# Altium PCB m_tas3_4layer.PcbDoc (part 2 of 2)
Units mm, origin at the board's own origin, x right, y up, seen from the top; angles counter-clockwise.
Board outline 100.71 x 81.15 mm, 4 copper layers (Top Layer, PWR, GND, Bottom Layer), stack 0.603 mm thick; 79 components, 40 nets, 216 pads, 95 vias.
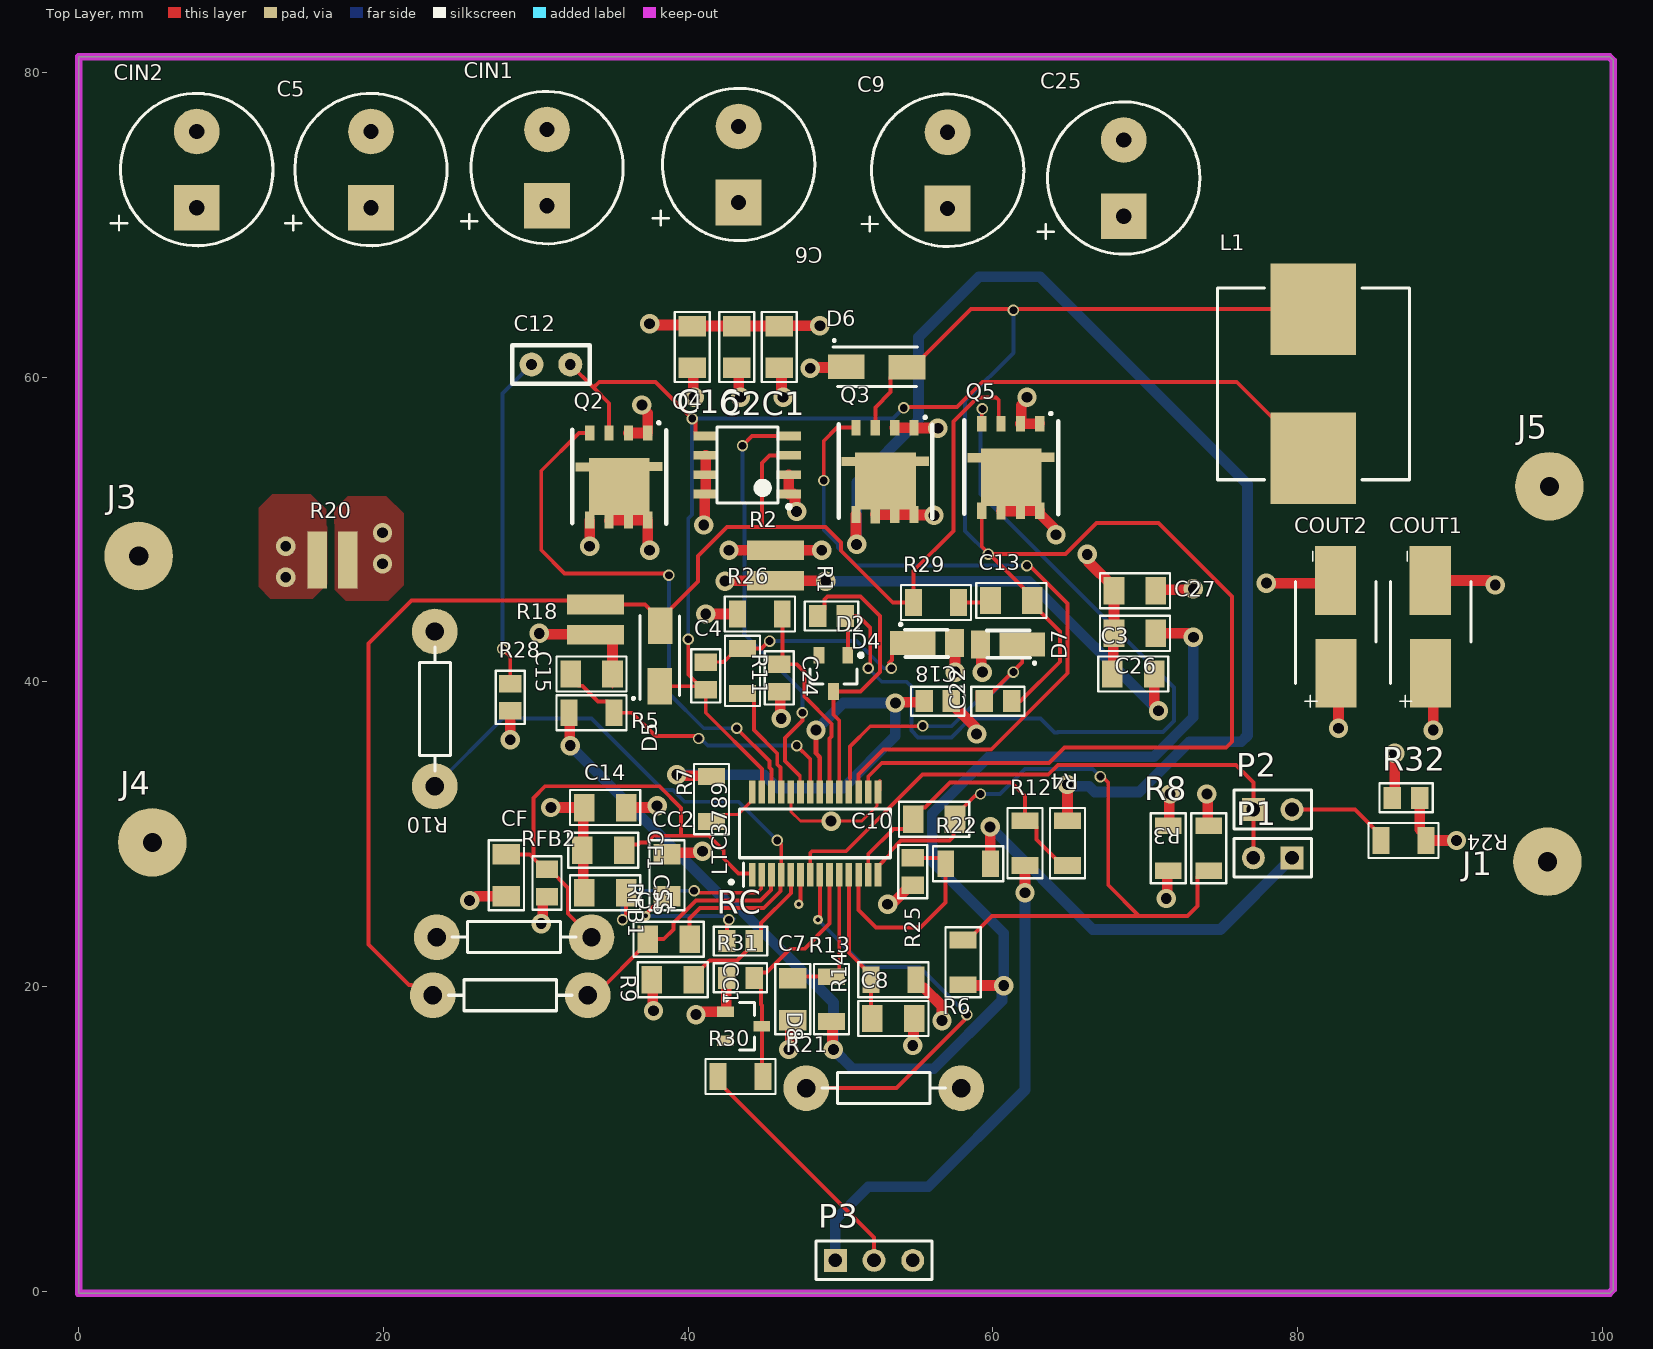
[diagram p0: Top Layer view]

## Via types
v1: diameter 1.27, hole 0.711, Top Layer to Bottom Layer, 65 vias
v2: diameter 0.75, hole 0.511, Top Layer to Bottom Layer, 27 vias
v3: diameter 0.635, hole 0.305, Top Layer to Bottom Layer, 3 vias

## Nets (pads, with @x,y where several pads share a name; then routed paths per layer and width w, separated by ;. In a path a pad name is that pad's centre, name@x,y a point inside that pad or via, vN(x,y) a via of type N, cw(c..) or ccw(c..) an arc to the next point about the centre after c; other vN are vias at no path point) (continued)
INTVCC: (continued)
  Top Layer w0.7: C14.1 37.846,31.75 v1(37.96,31.864) ; v1(39.243,33.909) 39.306,33.846 41.465,33.846 R7.1 ; v1(53.594,38.608) 53.657,38.672 55.413,38.672 C18.1 ; D4.2 57.509,42.523 57.509,40.662 v1(57.531,40.64) ; D7.2 59.243,42.389 59.243,40.706 v1(59.309,40.64) ; v1(59.817,30.48) 59.831,30.466 59.831,28.082 R22.1
  Bottom Layer w0.7: v1(39.243,33.909) 44.972,33.909 45.861,33.02 50.165,33.02 53.594,36.449 v1(53.594,38.608) 50.165,38.608 v1(48.387,36.83) ; v1(59.817,30.48) 66.548,23.749 74.93,23.749 P1.1
NetC4_1: C4.1 D4.1 R11.2 | length 16.7
  Top Layer w0.2: C4.1@40.74,41.705 C4.1 42.173,41.297 ; 42.659,41.634 42.659,41.665 43.109,42.115 R11.2@43.434,42.115
  Top Layer w0.254: 42.173,41.297 42.322,41.297 42.659,41.634 ; R11.2 44.817,42.193 45.296,42.672 v2(45.339,42.672) ; v2(53.334,40.894) 53.239,40.989 53.239,41.199 53.188,41.25 53.369,41.431 53.369,41.892 54.022,42.545 D4.1
  Bottom Layer w0.254: v2(45.339,42.672) 51.054,42.672 52.832,40.894 v2(53.334,40.894)
NetC4_2: C4.2 C12.2 D5.1 L1.1 LTC3789.27 Q2.3 Q4.5 | length 88.4
  Top Layer w0.2: LTC3789.27@44.795,33.402 44.767,33.402 44.767,32.831 LTC3789.27
  Top Layer w0.254: C12.2 33.782,59.309 ; Q2.3 34.807,58.284 33.782,59.309 ; D5.1 C4.2@40.785,39.71 ; v2@40.005,42.926 v2(40.005,42.799) 40.005,40.49 C4.2@40.785,39.71 ; Q4.5 40.644,56.134 40.486,56.292 40.486,57.05 v2(40.259,57.277) 37.846,59.69 34.163,59.69 33.782,59.309 ; LTC3789.27@44.795,33.402 44.832,33.402 44.832,34.289 41.148,37.973 C4.2 40.998,39.497 C4.2@40.785,39.71 ; v2(54.139,57.975) 54.202,58.039 57.648,58.039 59.299,59.69 75.999,59.69 L1.1
  Bottom Layer w0.254: v2(40.005,42.799) 40.005,50.713 40.259,50.967 v2(40.259,57.277) 53.44,57.277 v2(54.139,57.975)
NetC7_2: C7.2 LTC3789.10 R13.1 | length 9.5
  Top Layer w0.254: C7.2 46.963,20.652 R13.1 49.489,20.652 49.912,21.075 LTC3789.10
NetC8_2: C8.2 LTC3789.11 R14.1 | length 10.1
  Top Layer w0.254: LTC3789.11 50.546,22.218 51.992,20.772 R14.1 51.992,18.007 C8.2
NetC10_1: C10.1 LTC3789.13 R4.1 R12.1 | length 20.3
  Top Layer w0.254: LTC3789.13 51.816,28.702 53.467,30.353 54.211,30.353 54.759,30.901 C10.1 54.759,31.213 55.307,31.761 55.532,31.761 57.172,33.401 61.214,33.401 62.103,32.512 R12.1 62.428,30.89 62.851,30.467 62.851,29.661 64.572,27.94 R4.1
NetC10_2: C10.2 LTC3789.14 R3.1 R6.1 | length 47.9
  Top Layer w0.254: LTC3789.14 52.452,27.887 53.259,28.694 53.259,28.875 53.975,29.591 57.15,29.591 57.415,29.856 57.415,30.894 C10.2 57.509,31.213 58.808,32.512 v2@59.055,32.512 ; R6.1 58.364,23.065 59.937,24.638 69.596,24.638 ; v2@67.183,33.782 67.564,33.401 67.564,26.67 69.596,24.638 ; R3.1 73.843,27.608 73.42,27.185 73.42,25.287 72.771,24.638 69.596,24.638
  Bottom Layer w0.254: v2(59.182,32.639) 60.452,32.639 62.103,34.29 66.548,34.29 v2(67.056,33.782)
NetC11_1: C11.1 LTC3789.3 R9.2 | length 16.3
  Top Layer w0.254: R9.2 33.88,19.431 37.338,22.889 C11.1 38.394,23.114 39.032,23.752 39.032,24.172 40.514,25.653 44.745,25.653 45.431,26.339 45.431,27.306 LTC3789.3
NetC11_2: C11.2 LTC3789.4 R10.2 | length 39.2
  Top Layer w0.254: C11.2 40.088,24.467 40.766,25.145 44.956,25.145 46.065,26.254 46.065,27.304 LTC3789.4 46.102,29.336 v2(45.847,29.591)
  Bottom Layer w0.254: R10.2 27.813,37.592 33.655,37.592 38.354,32.893 38.989,32.893 39.751,32.131 43.307,32.131 v2(45.847,29.591)
NetC12_1: C12.1 R28.2 | length 21.8
  Top Layer w0.254: v2@27.94,42.037 28.321,41.656 R28.2
  Bottom Layer w0.254: v2(27.813,42.164) 27.813,58.928 C12.1
NetC13_1: C13.1 R29.2 | length 2.2
  Top Layer w0.254: R29.2 59.712,45.212 C13.1
NetC13_2: C13.2 C22.2 D6.2 L1.2 LTC3789.16 Q3.3 Q5.5 | length 121.7
  Top Layer w0.254: LTC3789.16 51.816,33.782 52.705,34.671 63.671,34.671 64.687,35.687 75.311,35.687 75.692,36.068 75.692,45.593 70.866,50.419 66.802,50.419 64.77,48.387 v2@59.766,48.387 ; Q3.3 52.28,58.015 53.285,59.02 53.285,59.979 53.958,60.652 D6.2 54.758,60.652 58.569,64.463 L1.2 ; Q5.5 59.265,48.888 v2@59.766,48.387 ; v2(59.69,48.387) v2@59.766,48.387 ; C22.2 61.805,38.735 64.389,41.319 64.389,43.314 62.589,45.114 C13.2 62.589,45.564 v2@59.766,48.387
  Bottom Layer w0.254: v2(59.69,48.387) 58.166,49.911 58.166,58.42 61.341,61.595 v2(61.341,64.389)
NetC15_1: C15.1 LTC3789.22 R5.1 | length 20.5
  Top Layer w0.254: C15.1 32.28,40.288 32.828,39.74 33.053,39.74 34.072,38.721 34.707,38.721 35.13,38.298 R5.1 36.322,37.973 37.846,36.449 40.534,36.449 40.534,36.43 v2(40.683,36.281) ; v2(47.117,35.814) 48.006,34.925 LTC3789.22
  Bottom Layer w0.254: v2(40.683,36.281) 40.817,36.281 41.284,35.814 v2(47.117,35.814)
NetC22_1: C22.1 D7.1 LTC3789.18 | length 21.7
  Top Layer w0.2: LTC3789.18 50.611,32.831 50.611,33.676 ; C22.1@58.95,39.36 58.95,38.735 C22.1
  Top Layer w0.254: 50.611,33.676 50.611,35.749 51.945,37.084 55.372,37.084 v2(55.399,37.111) ; C22.1 59.425,38.885 59.873,39.333 59.966,39.333 61.927,41.294 D7.1
  Bottom Layer w0.254: v2(55.399,37.111) 55.425,37.084 57.281,37.084 59.011,38.815 59.516,38.815 v2(61.341,40.64)
NetC24_1: C24.1 LTC3789.20 R26.1 | length 13.9
  Top Layer w0.254: R26.1 46.179,41.364 C24.1 47.106,41.159 47.625,40.64 47.625,39.029 49.403,37.251 49.403,36.409 49.276,36.282 LTC3789.20
NetCC1_2: CC1.2 LTC3789.5 RC.1 | length 10.6
  Top Layer w0.254: CC1.2 40.364,20.672 41.409,21.717 43.214,21.717 44.334,22.837 RC.1 44.782,23.435 44.782,24.168 46.736,26.122 LTC3789.5
NetCC2_2: CC2.2 RC.2 | length 9.3
  Top Layer w0.254: v3(37.211,24.638) 37.284,24.711 37.284,24.831 38.383,25.93 CC2.2 ; RC.2 42.534,24.112 42.672,24.25 v2(42.672,24.384)
  Bottom Layer w0.254: v3(37.211,24.638) 42.284,24.638 42.538,24.384 v2(42.672,24.384) ; v2@42.767,24.289 42.799,24.257 v2@42.996,24.454
NetCF1_2: CF1.2 CF.2 LTC3789.1 RFB1.2 RFB2.1 | length 35.1
  Top Layer w0.254: CF.2 29.601,28.68 RFB2.1@30.584,27.697 ; 29.845,28.586 29.845,32.385 30.607,33.147 38.114,33.147 39.538,31.723 39.538,29.901 ; RFB2.1 30.884,27.697 32.113,26.468 32.113,24.783 RFB1.2 ; CF1.2 36.169,29.333 36.699,29.333 36.83,29.464 37.278,29.464 37.715,29.901 39.538,29.901 ; LTC3789.1 44.105,27.432 43.307,27.432 42.334,28.405 42.334,28.928 41.36,29.901 39.538,29.901
NetCSS_1: CSS.1 LTC3789.2 | length 13.5
  Top Layer w0.254: v2(35.687,24.384) 35.687,24.518 35.919,24.75 CSS.1 ; v2@40.386,26.162 44.535,26.162 44.795,26.421 44.795,27.304 LTC3789.2
  Bottom Layer w0.254: v2(35.687,24.384) 35.687,25.527 36.449,26.289 v2(40.386,26.289)
NetD2_1: D2.1 Q5.4 R1.1 | length 58.8
  Top Layer w0.254: D2.1 50.48,44.146 R1.1 51.181,44.323 51.943,43.561 v2@51.943,41.021 ; Q5.4 59.265,57.868 v2(59.309,57.912)
  Bottom Layer w0.254: v2(51.816,40.894) 52.705,40.005 54.334,40.005 54.643,39.697 54.643,36.797 55.085,36.355 57.27,36.355 58.507,37.592 63.119,37.592 64.03,36.681 64.24,36.681 64.262,36.703 71.15,36.703 71.882,37.435 71.882,39.624 59.182,52.324 v2@59.182,58.039
NetD2_3: D2.3 LTC3789.19 R1.2 | length 20
  Top Layer w0.2: R1.2@48.166,44.66 R1.2
  Top Layer w0.254: R1.2 48.951,44.771 48.951,45.395 49.149,45.593 51.308,45.593 52.578,44.323 52.578,40.64 51.308,39.37 D2.3 49.53,37.842 49.912,37.46 LTC3789.19
NetD5_2: D5.2 Q4.3 Q5.3 R9.1 R18.1 R29.1 | length 93.6
  Top Layer w0.254: R9.1 22.498,19.431 21.831,20.098 21.685,20.098 19.028,22.755 19.028,42.523 21.844,45.339 33.655,45.339 R18.1 37.159,45.085 D5.2@38.154,44.09 ; D5.2 D5.2@38.154,44.09 ; Q4.3 45.339,54.864 44.831,54.356 44.831,50.292 44.958,50.165 ; Q5.3 60.382,57.09 60.382,58.49 60.204,58.668 58.996,58.668 57.404,57.076 57.404,49.911 54.786,47.293 R29.1 53.427,45.212 50.038,48.601 50.038,49.149 49.022,50.165 44.958,50.165 ; D5.2@38.154,44.09 40.64,46.576 40.64,48.26 42.545,50.165 44.831,50.165 44.958,50.165
NetD8_3: D8.3 LTC3789.9 R30.2 R31.1 | length 16.4
  Top Layer w0.254: R30.2 44.831,14.175 D8.3 44.831,18.769 44.771,18.829 44.771,20.126 R31.1 44.682,20.933 45.13,20.933 46.676,22.479 47.625,22.479 49.276,24.13 LTC3789.9
NetLTC3789_7: LTC3789.7 P1.2 P2.1 | length 38.3
  Top Layer w0.254: LTC3789.7 48.006,28.758 48.133,28.885 50.348,28.885 55.378,33.915 63.633,33.915 64.262,34.544 75.946,34.544 77.089,33.401 P2.1 P1.2
NetLTC3789_8: LTC3789.8 R21.2 | length 28
  Top Layer w0.254: R21.2 53.66,13.335 58.293,17.968 v2(58.293,18.161) ; v3(48.514,24.384) 48.514,24.487 48.642,24.615 LTC3789.8
  Bottom Layer w0.254: v3(48.514,24.384) 51.614,21.284 55.17,21.284 v2(58.293,18.161)
NetLTC3789_12: LTC3789.12 R22.2 R25.1 | length 14.1
  Top Layer w0.254: LTC3789.12 51.182,25.018 52.324,23.876 55.245,23.876 56.896,25.527 R22.2 56.515,28.448 R25.1
NetLTC3789_17: LTC3789.17 Q3.4 | length 48.7
  Top Layer w0.254: v2(48.895,53.213) 48.895,55.816 49.762,56.683 Q3.4 ; LTC3789.17 51.182,33.926 52.816,35.56 59.889,35.56 64.897,40.568 64.897,45.145 62.411,47.631 v2(62.23,47.631)
  Bottom Layer w0.254: v2(48.895,53.213) 48.895,49.951 49.812,49.034 49.812,48.828 51.008,47.631 v2(62.23,47.631)
NetLTC3789_23: LTC3789.23 Q4.4 | length 28.6
  Top Layer w0.2: 47.324,33.829 47.324,32.814 LTC3789.23
  Top Layer w0.254: v2(43.561,55.499) 44.196,56.134 Q4.4 ; 47.324,33.829 46.355,34.798 46.355,36.322 47.498,37.465 v2(47.498,37.973)
  Bottom Layer w0.254: v2(43.561,55.499) 43.561,51.856 43.688,51.729 43.688,43.18 43.666,43.158 47.498,39.326 v2(47.498,37.973)
NetLTC3789_25: LTC3789.25 R11.1 | length 7.8
  Top Layer w0.2: LTC3789.25@46.038,32.701 LTC3789.25@46.038,33.528
  Top Layer w0.254: R11.1 43.886,39.243 44.309,38.82 44.309,36.844 45.847,35.306 45.847,34.588 46.065,34.37 LTC3789.25@46.065,33.528
NetLTC3789_26: LTC3789.26 Q2.4 | length 37
  Top Layer w0.254: Q2.4 32.822,56.327 30.353,53.858 30.353,48.641 31.877,47.117 v2@38.862,47.117 ; v2@43.18,37.084 v2(43.18,36.957) 45.339,34.798 45.339,34.377 45.466,34.25 LTC3789.26
  Bottom Layer w0.254: v2(38.735,46.99) 38.735,39.243 41.021,36.957 v2(43.18,36.957)
NetLTC3789_28: LTC3789.28 R7.2 | length 3.8
  Top Layer w0.2: R7.2 41.979,31.282 43.258,31.282 44.196,32.22 LTC3789.28
NetP2_2: P2.2 R24.1 | length 6.9
  Top Layer w0.254: P2.2 83.764,31.623 85.471,29.916 R24.1
NetP3_2: P3.2 R30.1 | length 16.3
  Top Layer w0.254: R30.1 41.959,13.772 52.197,3.534 P3.2
VIN: C9.1 C25.1 C26.1 C27.1 Q2.5 R5.2 R6.2 R13.2 R20.2 R28.1 | length 95.5
  Top Layer w0.7: v1(28.321,36.195) R28.1 ; R5.2 32.219,37.934 32.219,35.853 v1(32.258,35.814) ; v1(33.528,48.895) 33.537,48.904 Q2.5 ; R13.2 49.466,17.639 49.466,15.938 v1(49.53,15.875) ; R6.2 58.088,20.066 v1(60.706,20.066) ; C26.1 72.744,43.18 72.998,42.926 v1(73.152,42.926) ; C27.1 70.758,46.038 73.088,46.038 v1(73.152,46.101)
  Bottom Layer w0.7: v1(32.258,35.814) 42.709,25.363 43.12,25.363 49.53,18.953 v1(49.53,15.875) 50.8,14.605 56.122,14.605 60.597,19.08 60.597,19.957 v1(60.706,20.066) 60.706,23.495 56.007,28.194 56.007,31.369 59.727,35.089 70.57,35.089 73.152,37.671 v1(73.152,42.926)
  other v1: 19.939,47.752 19.939,49.784
VIN+: C5.1 C6.1 CIN1.1 CIN2.1 J3.1 P3.1 R12.2 R20.1 | length 33.4
  Top Layer w0.7: v1(62.103,26.162) R12.2
  Bottom Layer w0.7: P3.1 49.657,4.699 51.816,6.858 55.753,6.858 62.103,13.208 v1(62.103,26.162)
  other v1: 13.589,46.863 13.589,48.895
VOS+: CF.1 R8.1 RFB1.1 | length 4.4
  Top Layer w0.7: v1(25.654,25.654) 25.808,25.654 26.084,25.93 CF.1 ; v1(71.374,25.781) 71.438,25.845 71.438,27.544 R8.1
VOUT: C3.1 COUT1.1 COUT2.1 J1.1 R2.1 R3.2 R8.2 R14.2 R26.2 | length 51.9
  Top Layer w0.7: v1(41.148,44.45) R26.2 ; v1(42.418,46.609) 42.434,46.625 45.704,46.625 R2.1 45.736,46.625 49.006,46.625 v1(49.022,46.609) ; R14.2 54.942,20.122 55.142,19.922 55.467,19.922 56.66,18.729 56.66,17.772 v1(56.655,17.767) ; C3.1 70.59,38.53 70.866,38.254 v1(70.866,38.1) ; R8.2 71.564,30.621 71.564,32.575 v1(71.628,32.639) ; v1(74.041,32.639) 74.105,32.575 74.105,30.621 R3.2 ; COUT2.1 82.677,40.379 v1(82.677,36.957) ; COUT1.1 88.9,40.379 v1(88.9,36.83)
  Bottom Layer w0.7: v1(49.022,46.609) 62.357,46.609 v1(70.866,38.1)
VOUT1: C1.2 C2.2 C16.2 D6.1 Q3.5 R2.2 R4.2 | length 93.1
  Top Layer w0.7: C16.2 40.322,60.538 40.322,58.737 v1(40.386,58.674) ; v1(42.672,48.641) R2.2 v1(48.768,48.641) ; C2.2 43.325,60.456 43.325,58.783 v1(43.434,58.674) ; C1.2 46.119,60.456 46.119,58.783 v1(46.228,58.674) ; v1(48.006,60.579) 48.055,60.628 50.329,60.628 D6.1 ; Q3.5 51.01,49.066 v1(51.054,49.022) ; v1(64.887,33.262) 64.892,33.257 64.892,30.895 R4.2
  Bottom Layer w0.7: v1(51.054,49.022) 51.054,53.086 55.118,57.15 55.118,62.611 59.089,66.582 63.085,66.582 76.708,52.959 76.708,36.478 76.298,36.068 72.898,36.068 69.596,32.766 66.687,32.766 66.301,33.153 64.996,33.153 v1(64.887,33.262)
pads on no net: D2.2 D8.2 Q2. Q3. Q5.

## Polygon pours and split planes (outlines as drawn)
VIN+ on Top Layer "VIN+_L01_P002" (solid, remove dead copper, pour order 2): 12.573,45.466 11.811,46.228 11.811,51.435 12.7,52.324 15.24,52.324 16.383,51.181 16.383,46.482 15.367,45.466
VIN on Top Layer "VIN_L01_P001" (solid, remove dead copper, pour order 1): 17.526,45.339 16.764,46.101 16.764,51.308 17.653,52.197 20.193,52.197 21.336,51.054 21.336,46.355 20.32,45.339
VOUT on PWR "VOUT_L02_P006" (solid, pour order 6): 41.529,47.498 50.038,47.498 50.038,46.101 49.53,45.593 48.133,43.434 45.212,43.434 44.577,43.434 40.386,43.434 40.005,43.815 40.005,45.974
VOS+ on PWR "VOS+_L02_P008" (solid, pour order 8): 69.723,27.051 70.485,27.813 75.311,27.813 75.692,27.432 75.692,9.017 71.882,5.207 25.4,5.207 16.7,14.414 16.51,14.605 16.51,26.416 18.288,28.194 29.21,28.194 29.718,27.686 29.718,25.019 29.337,24.638 25.273,24.638 25.273,21.971 24.892,21.59 21.717,21.59 20.066,18.161 29.591,8.636 61.341,8.636 69.723,17.018
VIN on PWR "VIN_L02_P014" (solid, pour order 14): 26.924,41.212 28.067,41.212 30.29,38.989 33.655,38.989 34.417,38.227 34.417,34.036 33.909,33.528 28.321,33.528 25.273,36.576 25.273,45.085 22.606,45.593 20.32,43.307 18.479,43.307 17.209,44.577 17.209,45.085 17.208,53.095 17.707,53.594 20.32,53.594 20.368,53.546 20.415,53.594 33.02,53.594 35.433,51.181 35.433,48.133 34.544,47.244 30.607,47.244 28.067,44.704 26.924,43.434
VOUT1 on PWR "VOUT1_L02_P004" (solid, pour order 4): 66.421,30.162 66.23,29.972 65.468,29.21 64.516,29.21 63.881,29.845 63.881,41.021 57.277,47.625 41.148,47.625 38.481,50.292 38.481,60.96 39.497,61.976 50.8,61.976 50.927,61.912 52.197,60.642 52.197,59.309 49.276,56.388 49.276,50.673 49.911,50.038 61.722,50.038 66.421,45.339
VIN on PWR "VIN_L02_P015" (solid, pour order 15): 53.848,73.025 52.832,72.009 52.832,70.231 56.007,67.056 65.913,57.15 65.913,50.927 69.342,47.498 69.342,42.672 74.295,42.037 74.295,72.263 73.533,73.025
VIN+ on PWR "PWR-VIN+" (solid, pour order 12): 46.99,65.659 48.768,67.437 48.768,72.136 47.371,73.533 47.117,73.533 41.148,73.533 5.461,73.533 0.635,68.707 0.635,42.545 7.747,40.132 7.747,25.908 7.366,25.908 2.127,20.669 2.127,0.667 2.286,0.508 50.8,0.508 50.927,0.635 50.8,0.762 50.8,4.318 20.701,4.318 14.732,10.287 14.732,39.751 16.51,42.545 16.51,54.864 27.305,65.659
no net on PWR "NONET_L02_P016" (solid, pour order 16): 54.102,63.246
no net on PWR "NONET_L02_P009" (solid, pour order 9): 69.977,24.257
no net on PWR "NONET_L02_P007" (solid, pour order 7): 41.021,46.228
VOUT on PWR "VOUT_L02_P005" (solid, pour order 5): 93.726,22.86 95.25,21.336 97.536,21.336 99.822,23.622 99.822,38.354 94.615,43.561 79.756,43.561 78.105,41.91 70.231,41.91 68.707,40.386 68.707,29.591 65.405,26.289 65.405,21.082 63.246,18.923 56.134,18.923 55.499,18.288 55.88,16.383 58.039,15.875 67.437,15.875 68.707,17.145 68.707,27.051 70.993,29.337 74.295,29.337 75.438,30.48 75.438,33.782 75.819,34.163 89.916,34.163 93.726,30.353
INTVCC on PWR "INTVCC_L02_P003" (solid, pour order 3): 42.227,31.623 41.338,30.734 34.544,30.734 34.29,30.988 34.29,33.274 36.703,35.687 49.657,35.687 53.721,39.751 53.721,39.878 56.261,43.815 56.388,43.815 59.944,43.815 60.198,43.561 60.198,40.386 59.436,39.624 58.293,38.862 57.214,37.402 57.214,36.893 60.579,33.274 60.579,26.797 60.198,26.416 58.928,26.416 52.832,32.512 42.545,32.512
GND on GND "GND_L03_P023" (solid, pour order 23): 0.254,0.889 100.203,0.889 100.203,80.645 99.822,81.026 0,81.026 0,80.899 0.254,80.645
GND_SIGNAL on GND "GND_SIGNAL_L03_P022" (solid, pour order 22): 43.942,33.528 44.323,33.147 44.323,26.67 45.212,25.781 46.228,26.797 59.944,26.797 66.548,33.401 66.929,33.528 89.916,33.528 90.043,33.655 94.361,33.655 94.361,3.175 91.059,-0.127 43.512,-0.127 43.41,-0.23 29.21,13.97 29.21,32.004 30.734,33.528
no net on GND "NONET_L03_P019" (solid, pour order 19): 29.845,32.766
no net on GND "NONET_L03_P018" (solid, pour order 18): 29.591,21.209

## Keep-outs
Keep-Out Layer:
  lines w0.254: -0.127,-0.127 ccw(c0,-0.127) 0,-0.254 ; -0.127,-0.127 ccw(c0,-0.127) 0,-0.254 ; -0.127,-0.127 -0.127,81.026 ; -0.127,81.026 cw(c0,81.026) 0,81.153 ; -0.127,81.026 cw(c0,81.026) 0,81.153 ; 0,-0.254 100.457,-0.254 ; 0,81.153 100.457,81.153 ; 100.457,-0.254 ccw(c100.457,-0.127) 100.547,-0.216 ; 100.457,-0.254 ccw(c100.457,-0.127) 100.547,-0.217 100.547,-0.216 ; 100.457,81.153 cw(c100.457,81.026) 100.547,81.115 ; 100.457,81.153 cw(c100.457,81.026) 100.547,81.116 100.547,81.115 ; 100.547,-0.216 100.8,0.037 ; 100.547,81.115 100.8,80.862 ; 100.8,0.037 ccw(c100.711,0.127) 100.838,0.127 ; 100.8,0.037 100.801,0.037 ccw(c100.711,0.127) 100.838,0.127 ; 100.8,80.862 cw(c100.711,80.772) 100.838,80.772 ; 100.8,80.862 100.801,80.862 cw(c100.711,80.772) 100.838,80.772 ; 100.838,0.127 100.838,80.772 ; 0.127,0 100.404,0 100.584,0.18 100.584,80.719 100.404,80.899 0.127,80.899 0.127,0

## Silkscreen, mask and mechanical layers (free items; w line width, h text height)
Top Overlay:
  text "VIN" at 7.747,148.844 h1.52
  text "VOUT" at 95.758,148.844 h1.5
  text "5V-36V" at 5.842,146.304 h1.52
  text "MAX" at 96.139,144.018 h1.52
  text "12V@5A" at 118.364,91.059 h1.52
  text "HIGH EFFICIENCY STEP UP/DOWN DC/DC CONVERTER" at -21.59,89.932 h1
Mechanical 1:
  the board outline again, w0.1